# Altium PCB PCB1.PcbDoc
Units mil, origin at the board's own origin, x right, y up, seen from the top; angles counter-clockwise.
Board outline 1717.66 x 1490 mil, 2 copper layers (Top Layer, Bottom Layer); 23 components, 12 nets, 71 pads, 112 vias.
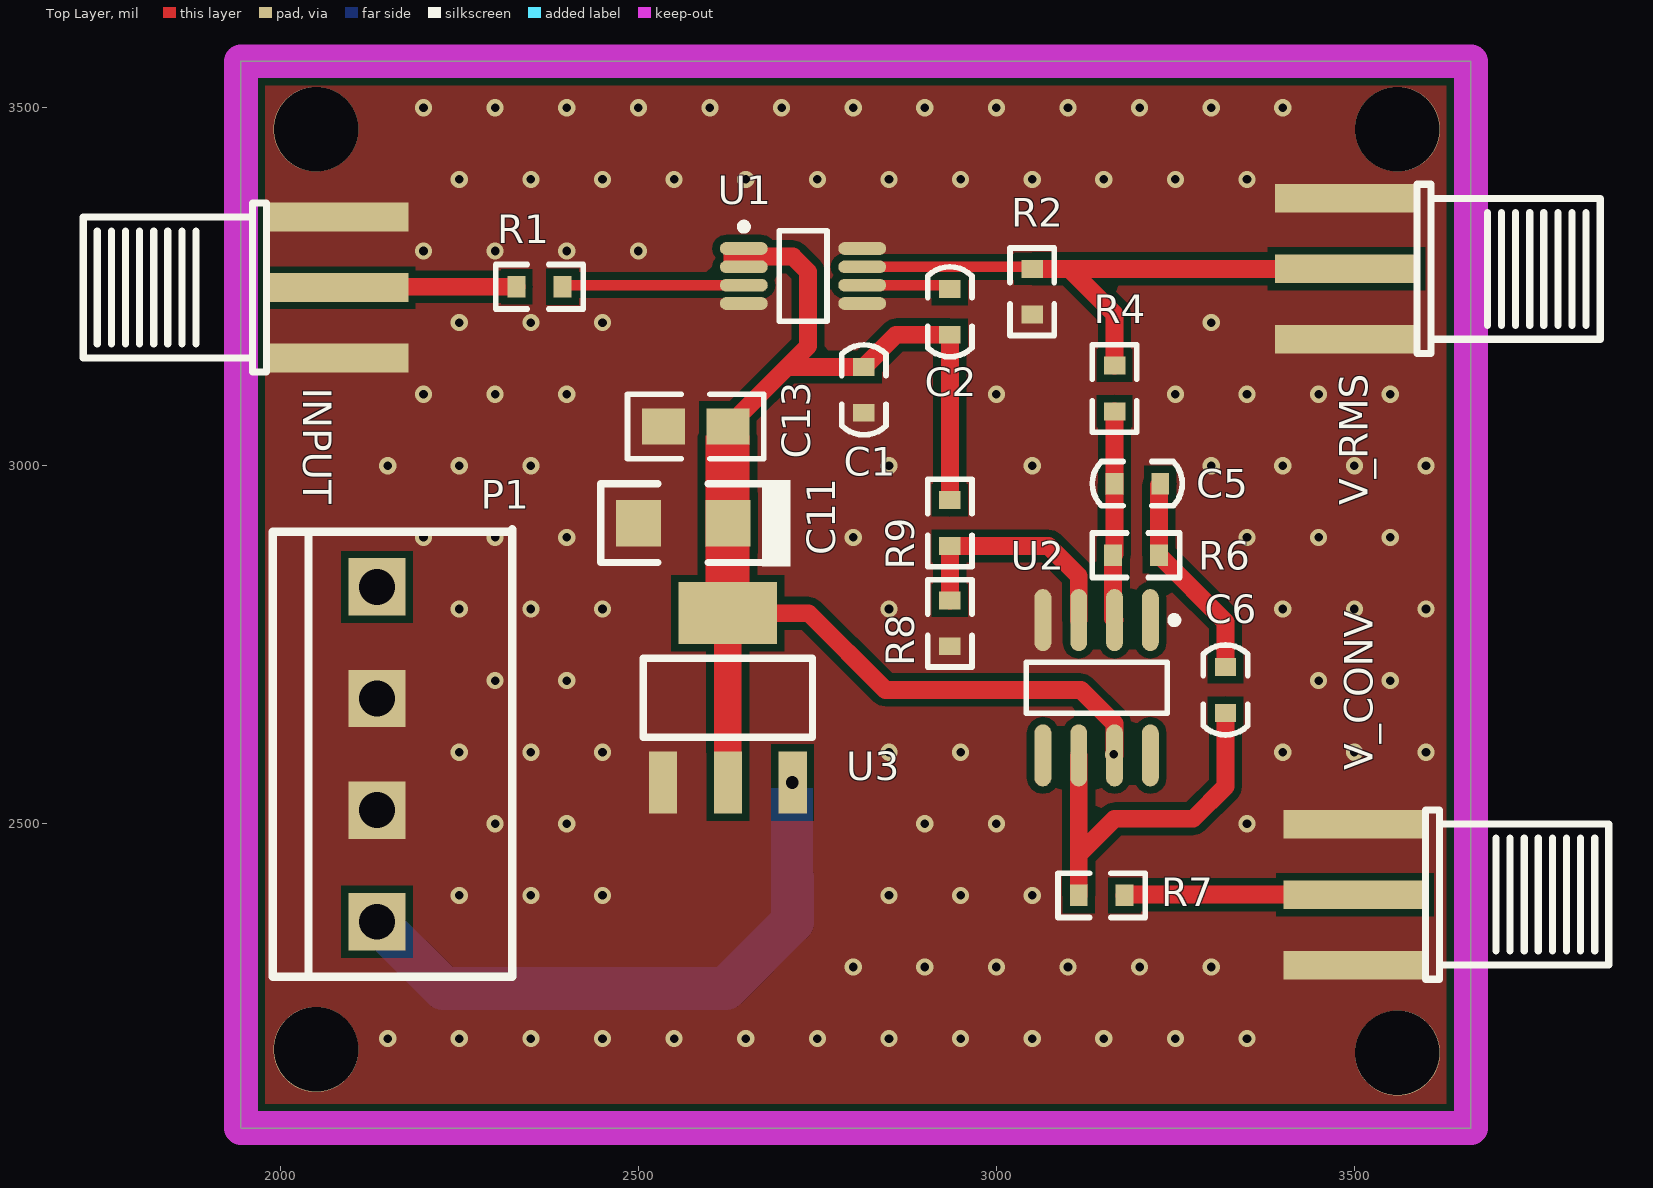
[diagram p0: Top Layer view]
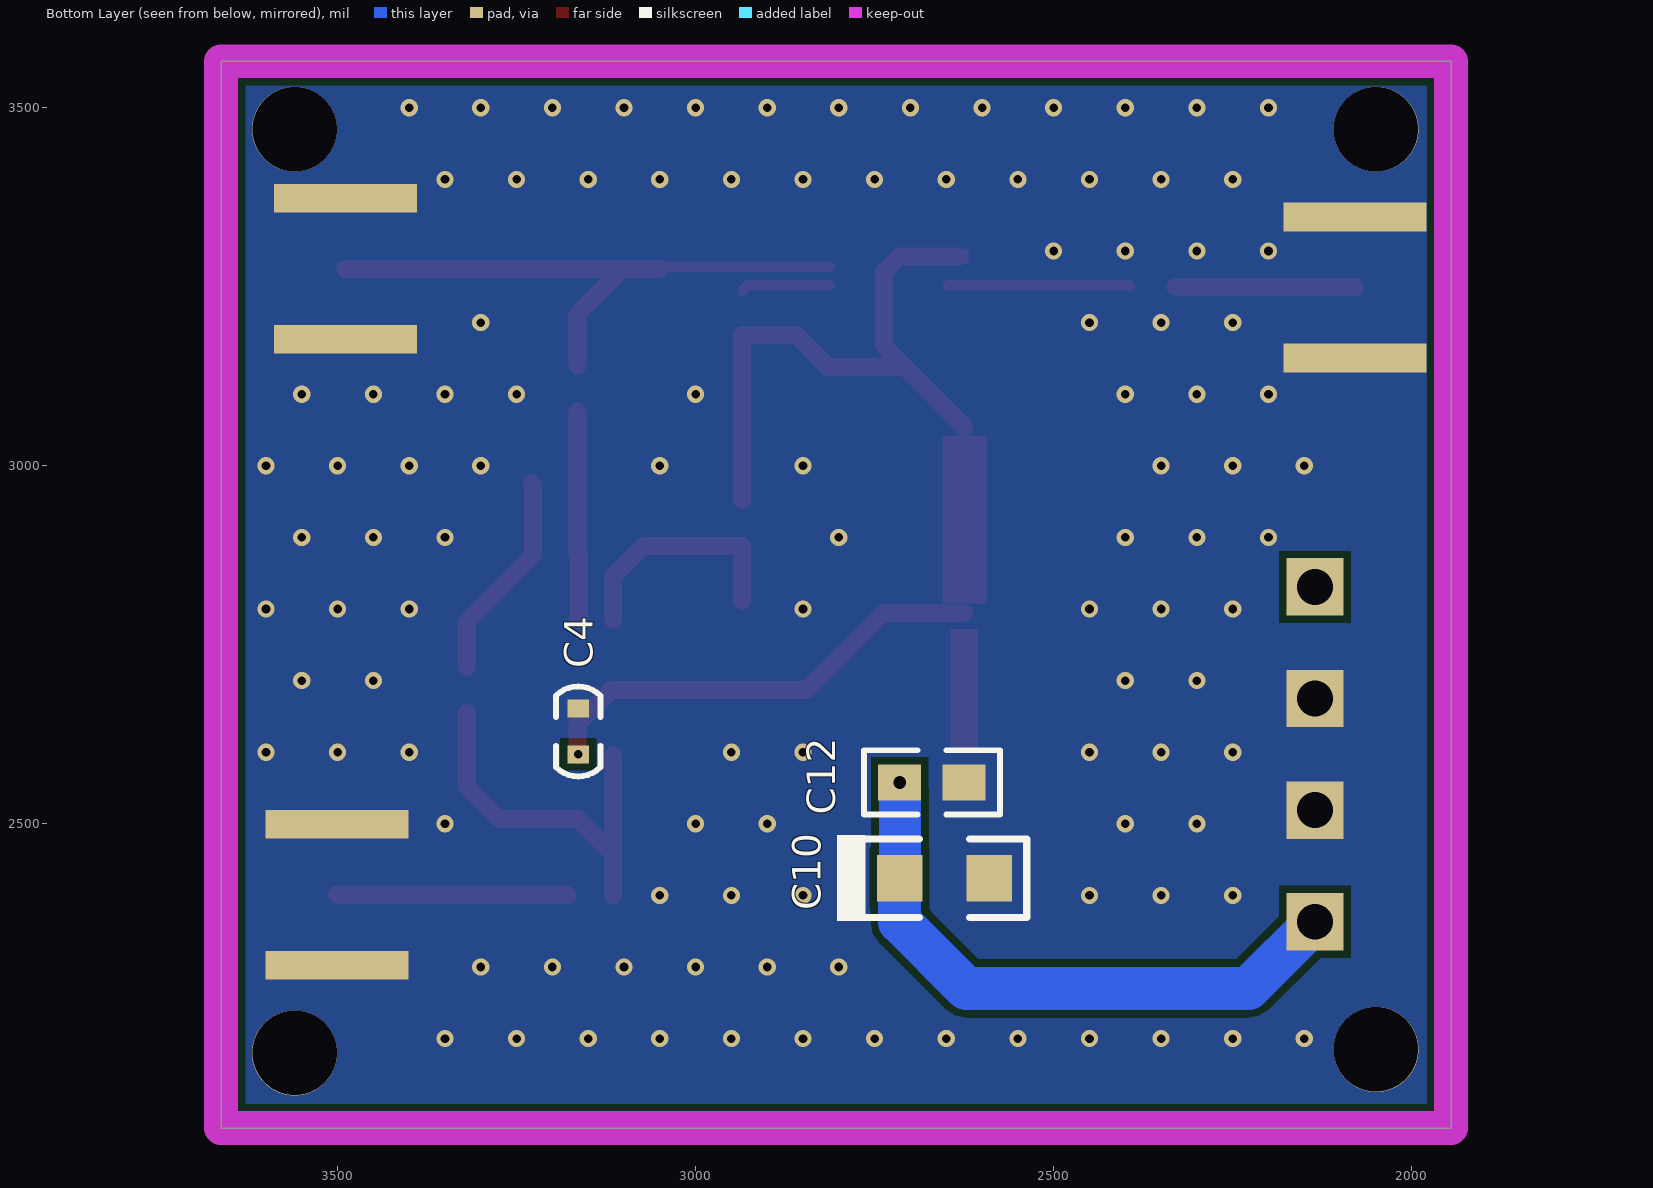
[diagram p1: Bottom Layer view, seen from below]

## Layer stack, top to bottom
Top Solder: solder mask 0.4, Solder Resist, Dk 3.5
Top Layer: signal copper 1.4
Dielectric 1: dielectric 12.6, FR-4, Dk 4.8
Bottom Layer: signal copper 1.4
Bottom Solder: solder mask 0.4, Solder Resist, Dk 3.5

## Board outline
1945,2075 3662.66,2075 3662.66,3565 1945,3565

## Design rules (kind name [scope] priority, off if disabled: settings)
Clearance [All] p1: gap=10
PolygonConnect [All] p1: connectstyle=Direct reliefconductorwidth=10 reliefentries=4 polygonreliefangle="90 Angle" airgapwidth=10
RoutingVias [All] p1: holewidth=28 width=50 viastyle="Through Hole" minholewidth=28 minwidth=50 maxholewidth=28 maxwidth=50
SolderMaskExpansion [All] p1: expansion=4
Width [All] p1: maxlimit=100 minlimit=6 preferedwidth=10
30 further rules are at their usual default settings.

## Components (designator, comment, footprint, x,y, rotation, side; value= is the part's Value field where it differs from the comment)
C1 "0.01uf" 0603C 2815,3074 r90 top
C2 "0.27uf" 0603C 2935,3183 r90 top
C4 "0.1uf" 0603C 3164,2597 r90 bottom
C5 "20pf" 0603C 3228.84,2975 r180 top
C6 "3.3nf" 0603C 3320,2719 r270 top
C10 "Cap" 3216C-TYPE_A 2715,2424 r0 bottom
C11 "Cap" 3216C-TYPE_A 2625,2920 r0 top
C12 "0.1uf" 0805 2625,2557.89 r0 bottom
C13 "0.1uf" 0805 2535,3055 r0 top
INPUT "差分输出" SMA-LYING 2020,3245 r0 top (schematic designator Vo_S1)
P1 "VH3.96-4A" VH3.96-4P 1989.33,2286.42 r90 top
R1 "200K" 0603R 2362,3250 r0 top
R2 "12K" 0603R 3050,3243 r90 top
R4 "200K" 0603R 3165,3108 r90 top
R6 "82k" 0603R 3195,2875 r180 top
R7 "200K" 0603R 3147,2400 r0 top
R8 "200K" 0603R 2935,2780 r90 top
R9 "200K" 0603R 2935,2920 r90 top
U1 "AD8361ARM" ADI-RM-8_N 2730,3265 r0 top
U2 "AD820BR" ADI-R-8_N 3140,2690 r270 top
U3 "AMS1117-5V" SOT-223 2625,2676 r270 top
V_CONV "差分输出" SMA-LYING 3560,2405 r180 top (schematic designator Vo_S3)
V_RMS "差分输出" SMA-LYING 3548,3279 r180 top (schematic designator Vo_S2)

## Footprints (in the part's own frame and the unit in brackets; to place one, negate y for a bottom-side part, rotate by r counter-clockwise, add the part's x,y. Pads: shape width x height; smd on the part's side, far side on the other; paste and mask are expansions set on the pad)
0603C [mil]
  rect 25x30 smd: 1(0,0) 2(64,0)
  silkscreen extent -31,-31 95,31
0603R [mil]
  rect 25x30 smd: 1(-32,0) 2(32,0)
  silkscreen extent -61,-31 61,31
0805 [mil]
  rect 60x50 smd: 1(0,0) 2(90,0)
  silkscreen extent -50,-45 140,45
3216C-TYPE_A [mm]
  rect 1.6x1.65 smd: 1(0,0) 2(-3.175,0)
  silkscreen extent -4.51,-1.54 2.22,1.52
ADI-R-8_N [mm] "SOIC, 8-Leads, Body 4.9x3.9mm, Pitch 1.27mm, IPC Medium Density"
  oval 2.2x0.6 smd: 1(-2.4,1.905) 2(-2.4,0.635) 3(-2.4,-0.635) 4(-2.4,-1.905) 5(2.4,-1.905) 6(2.4,-0.635) 7(2.4,0.635) 8(2.4,1.905)
  silkscreen extent -2.52,-2.5 0.9,2.88, body extent -2,-2.5 2,2.5, height 1.75
ADI-RM-8_N [mm] "TSOP, 8-Leads, Body 3x3mm, Pitch 0.65mm, IPC Medium Density"
  oval 1.7x0.45 smd: 1(-2.1,0.975) 2(-2.1,0.325) 3(-2.1,-0.325) 4(-2.1,-0.975) 5(2.1,-0.975) 6(2.1,-0.325) 7(2.1,0.325) 8(2.1,0.975)
  silkscreen extent -2.22,-1.6 0.85,1.87, body extent -1.6,-1.6 1.6,1.6, height 1.1
SMA-LYING [mm]
  rect 5.08x1.016 smd: 0(1.5,0.1) 1(1.5,-2.4) 1(1.5,2.6)
  rect 5.08x1.016 smd far side: 1(1.5,-2.4) 1(1.5,2.6)
  silkscreen extent -7.5,-2.9 -1,3.1
SOT-223 [mm]
  rect 2.2x1 smd: 1(3,-2.3) 2(3,0) 3(3,2.3)
  rect 2.2x3.5 smd: 2(-3,0)
  silkscreen extent -1.4,-3 1.4,3, body extent -3.49,-3.24 3.49,3.24, height 1.64
VH3.96-4P [mil]
  rect 80x80 hole 50: 1(76.77,-145.67) 2(232.68,-145.67) 3(388.58,-145.67) 4(544.49,-145.67)
  silkscreen extent 0,-335 625,0

## Part data
C1 C2 C4 C5 C6 C12 C13: library part Cap
C10 C11: library part "Tantalium Cap"
INPUT V_CONV V_RMS: library part SMA
R1 R2 R4 R6 R7 R8 R9: library part Res
U1: "LF to 2.5 GHz TruPwr?Detector, 5祍 Response Time, RM-8, 50 Tube"
U2: "Single Channel Rail-to-Rail Operational Amplifier, 1.9 MHz BW, 3 V/us SR, Industrial, 8-pin SOIC (R-8), Tube"
U3: library part AMS1117-3.3V

## Via types
v1: diameter 24, hole 12, Top Layer to Bottom Layer, 107 vias
v2: diameter 118.5, hole 118.11, Top Layer to Bottom Layer, 4 vias
v3: diameter 30, hole 18, Top Layer to Bottom Layer, 1 vias

## Nets (pads, with @x,y where several pads share a name; then routed paths per layer and width w, separated by ;. In a path a pad name is that pad's centre, name@x,y a point inside that pad or via, vN(x,y) a via of type N, cw(c..) or ccw(c..) an arc to the next point about the centre after c; other vN are vias at no path point)
5V: C1.2 C2.1 C4.1 C11.1 C13.2 R9.2 U1.1 U1.2 U2.7 U3.2 | length 1501.1
  Top Layer w25: U3.2@2625,2794.11 2737.89,2794.11 2845,2687 3118,2687 3165,2640 U2.7 ; C13.2 2708,3138 ; 2632,3292 2716,3292 2737,3271 2737,3167 2708,3138 ; R9.2 C2.1 2860,3183 C1.2 2708,3138
  other v1: 3164,2597
GND: C1.1 C4.2 C10.2 C11.2 C12.1 C13.1 INPUT.1 P1.2 P1.3 R2.1 R8.1 U1.4 U1.5 U1.8 U2.4 U3.1 V_CONV.1 V_RMS.1
  other v1: 2150,2200 2250,2200 2350,2200 2450,2200 2550,2200 2650,2200 2750,2200 2850,2200 2950,2200 3050,2200 3150,2200 3250,2200 3350,2200 2800,2300 2900,2300 3000,2300 3100,2300 3200,2300 3300,2300 2250,2400 2350,2400 2450,2400 2850,2400 2950,2400 3050,2400 2300,2500 2400,2500 2900,2500 3000,2500 3350,2500 2250,2600 2350,2600 2450,2600 2850,2600 2950,2600 3400,2600 3500,2600 3600,2600 2300,2700 2400,2700 3450,2700 3550,2700 2250,2800 2350,2800 2450,2800 2850,2800 3400,2800 3500,2800 3600,2800 2200,2900 2300,2900 2400,2900 2800,2900 3350,2900 3450,2900 3550,2900 2150,3000 2250,3000 2350,3000 2850,3000 3050,3000 3300,3000 3400,3000 3500,3000 3600,3000 2200,3100 2300,3100 2400,3100 3000,3100 3250,3100 3350,3100 3450,3100 3550,3100 2250,3200 2350,3200 2450,3200 3300,3200 2200,3300 2300,3300 2400,3300 2500,3300 2250,3400 2350,3400 2450,3400 2550,3400 2650,3400 2750,3400 2850,3400 2950,3400 3050,3400 3150,3400 3250,3400 3350,3400 2200,3500 2300,3500 2400,3500 2500,3500 2600,3500 2700,3500 2800,3500 2900,3500 3000,3500 3100,3500 3200,3500 3300,3500 3400,3500
  other v2: 3560,2180 2050,2185 2050,3470 3560,3470
NetC2_2: C2.2 U1.6 | length 125.7
  Top Layer w15: U1.6 2926.8,3252.2 C2.2@2935,3244
NetC5_1: C5.1 C6.1 R6.1 | length 295.3
  Top Layer w25: C5.1 3227,2973.16 R6.1 3320,2782 C6.1
NetC5_2: C5.2 R4.1 R6.2 U2.2 | length 293.2
  Top Layer w25: U2.2 3163,2786.49 R6.2 3164.84,2876.84 C5.2 3165,2975.16 R4.1
NetC6_2: C6.2 R7.1 U2.6 | length 542.9
  Top Layer w25: R7.1 3115,2457 ; U2.6 3115,2457 ; C6.2 3320,2552 3275,2507 3165,2507 3115,2457
NetC10_1: C10.1 C12.2 P1.1 U3.3 | length 718.1
  Bottom Layer w60: P1.1 2228.19,2270 2622,2270 2715,2363 C10.1
  other v3: 2715,2557.89
NetR1_1: INPUT.0 R1.1 | length 251.4
  Top Layer w25: INPUT.0 2080.12,3250 R1.1
NetR1_2: R1.2 U1.3 | length 254.2
  Top Layer w15: R1.2 2396.2,3252.2 U1.3
NetR2_2: R2.2 R4.2 U1.7 V_RMS.0 | length 878.6
  Top Layer w15: U1.7 R2.2@3039.2,3277.8
  Top Layer w25: R4.2 3165,3212 3102,3275 R2.2 3050.06,3275.06 V_RMS.0
NetR7_2: R7.2 V_CONV.0 | length 322.4
  Top Layer w25: R7.2 3180.06,2401.06 V_CONV.0
NetR8_2: R8.2 R9.1 U2.3 | length 334.9
  Top Layer w25: R8.2 R9.1 3073,2888 3115,2846 U2.3
pads on no net: P1.4 U2.1 U2.5 U2.8

## Polygon pours and split planes (outlines as drawn)
GND on Bottom Layer "Top Layer-No Net" (solid, pour order 2): 1945,3565 1945,2075 1947,2077 3662.66,2077 3662.66,3565
GND on Top Layer "Top Layer-No Net" (solid, pour order 4): 1945,2075 3662.66,2075 3662.66,3565 1945,3565

## Keep-outs
Keep-Out Layer:
  the board outline again, w47.24

## Other copper
Top Layer:
  rectangle net 5V: 2619,3282 2631,3303
  rectangle net 5V: 2606,2599 2644,2772
  rectangle net 5V: 2594,2808 2655,3042
Bottom Layer:
  rectangle net NetC10_1: 2685,2412 2744,2550